# Altium PCB YiWallet-Enc-memory.PcbDoc
Units mm, origin at the board's own origin, x right, y up, seen from the top; angles counter-clockwise.
Board outline 21 x 39.53 mm, 2 copper layers (Top Layer, Bottom Layer); 21 components, 20 nets, 105 pads, 17 vias.
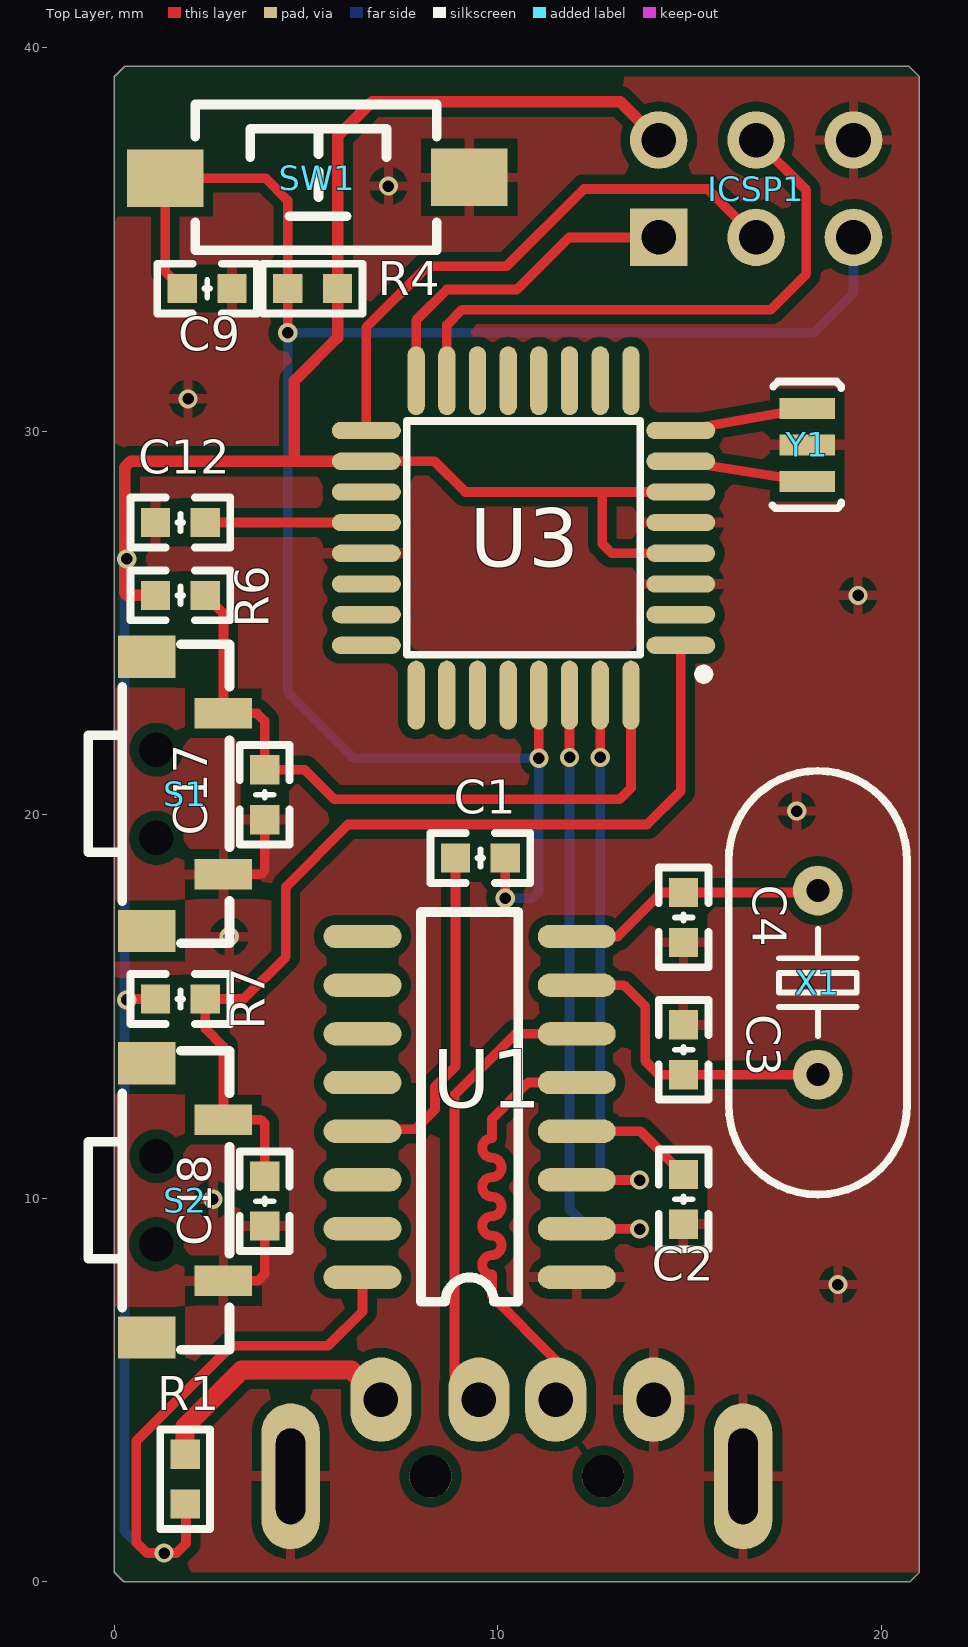
[diagram p0: Top Layer view]
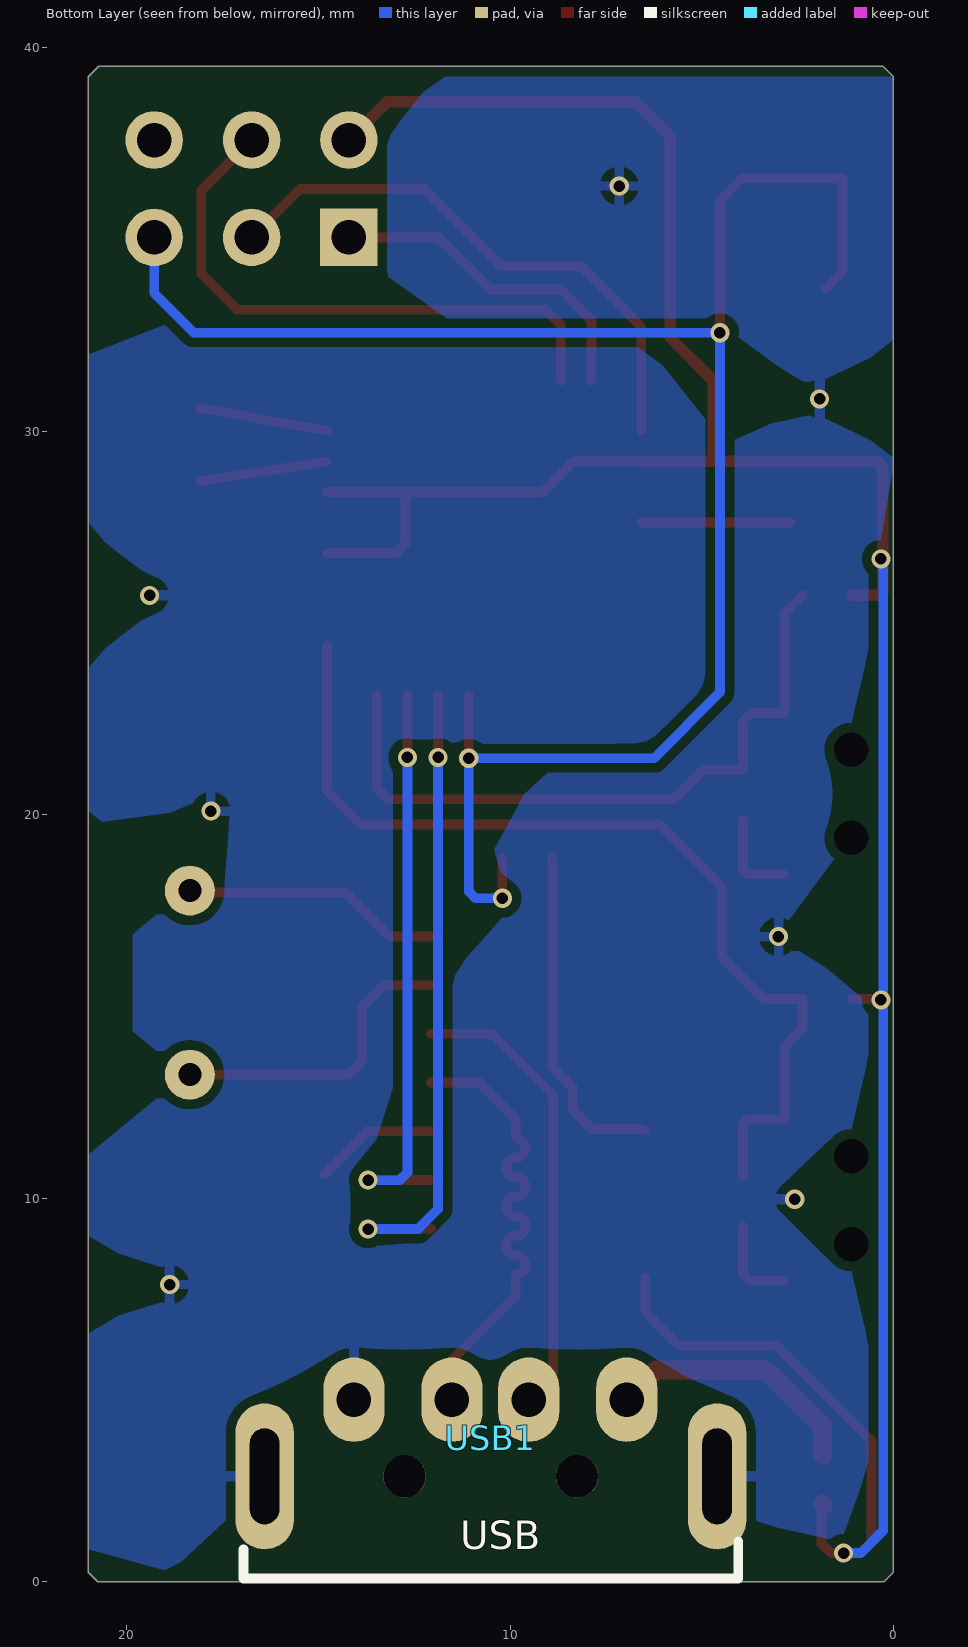
[diagram p1: Bottom Layer view, seen from below]
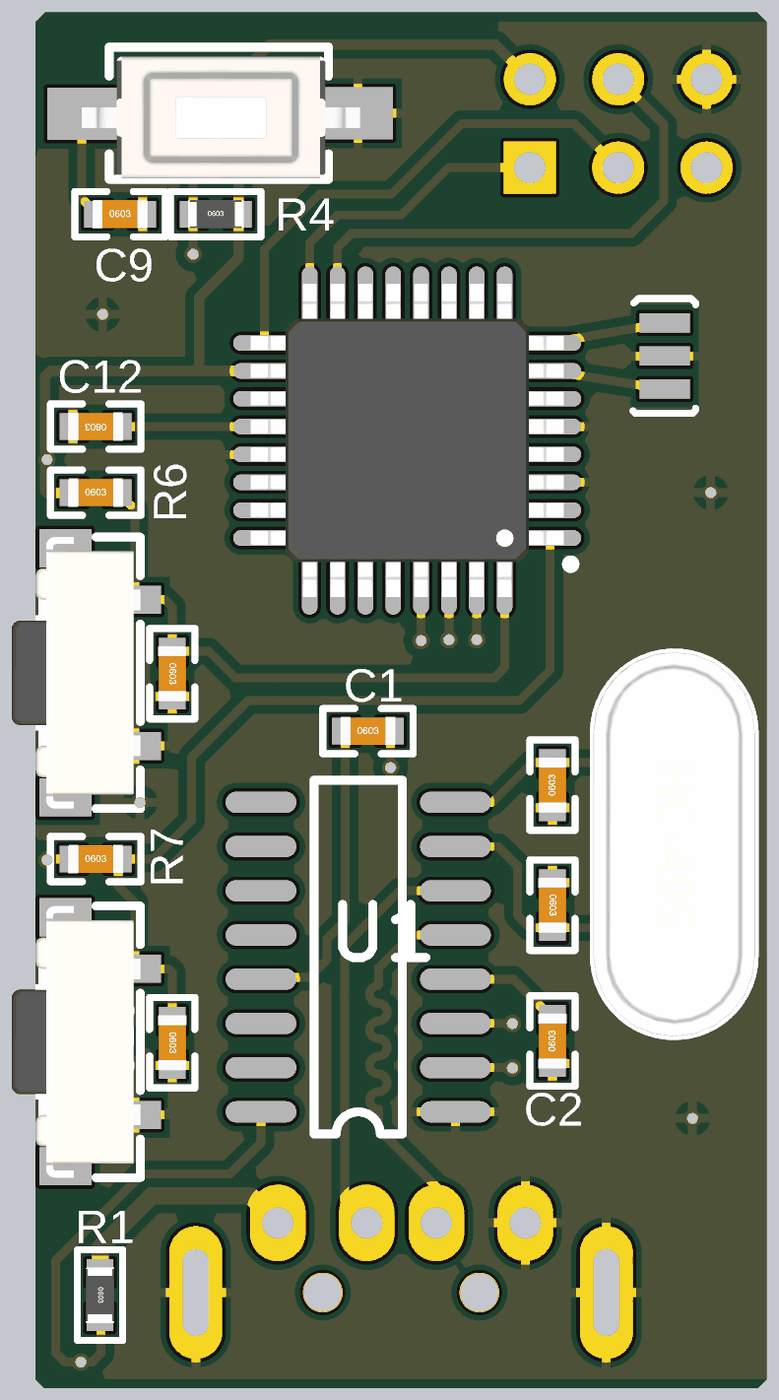
[diagram p2: 3D render of the assembled board from above, using the file's embedded part models]

## Layer stack, top to bottom
Top Solder: solder mask 0.0102, Solder Resist, Dk 3.5
Top Layer: signal copper 0.0356
Dielectric 1: dielectric 0.32, FR-4, Dk 4.8
Bottom Layer: signal copper 0.0356
Bottom Solder: solder mask 0.0102, Solder Resist, Dk 3.5

## Board outline
0.25,0 0,0.25 0,39.25 0.275,39.525 20.725,39.525 21,39.25 21,0.25 20.75,0

## Design rules (kind name [scope] priority, off if disabled: settings)
Clearance [All] p1: gap=0.254 ignorepadtopadclearanceinfootprint=FALSE except(0: Arc-Hole Track-Hole SMDPad-Hole THPad-Hole Via-Hole Fill-Hole Poly-Hole Region-Hole Text-Hole)
PolygonConnect [All] p1: connectstyle=Relief reliefconductorwidth=0.254 reliefentries=4 polygonreliefangle="90 Angle" airgapwidth=0.254
RoutingVias [All] p1: holewidth=0.711 width=1.27 viastyle="Through Hole" minholewidth=0.711 minwidth=1.27 maxholewidth=0.711 maxwidth=1.27
SolderMaskExpansion [All] p1: expansion=0.102
Width [All] p1: maxlimit=10 minlimit=0.254 preferedwidth=0.254 minimp=50.000000 maximp=50.000000 favimp=50.000000
30 further rules are at their usual default settings.

## Components (designator, comment, footprint, x,y, rotation, side; value= is the part's Value field where it differs from the comment)
C1 "104" "C 0603_L" 9.55,18.875 r0 top
C2 "104" "C 0603_L" 14.85,9.975 r90 top
C3 "22pF" "C 0603_L" 14.85,13.875 r270 top
C4 "22pF" "C 0603_L" 14.85,17.325 r90 top
C9 "104" "C 0603_L" 2.425,33.725 r0 top
C12 "0.1uF" "C 0603_L" 1.725,27.625 r180 top
C17 "0.1uF 50V" "C 0603_L" 3.925,20.525 r270 top locked
C18 "0.1uF 50V" "C 0603_L" 3.925,9.925 r270 top locked
ICSP1 "ICSP" HDR2X3 14.2,35.06 r0 top
R1 "BX" "R 0603_L" 1.85,2.675 r270 top
R4 "10K" "R 0603_L" 5.175,33.725 r0 top
R6 "4.7KΩ ±5%" "C 0603_L" 1.725,25.725 r0 top
R7 "4.7KΩ ±5%" "C 0603_L" 1.725,15.2 r0 top
S1 "SWITCH" "TSW 3*6*4.3-S-W" 1.1,20.55 r270 top
S2 "SWITCH" "TSW 3*6*4.3-S-W" 1.1,9.95 r270 top locked
SW1 "3x6x5" "TSW SMD-3*6*2.5" 5.325,36.625 r0 top
U1 "CH340G" SO-16 12.419,12.309 r180 top
U3 "ATmega328P-A" TQFP32-7*7 10.675,27.225 r90 top
USB1 "USB" USB_A/P_A 10.5,2.75 r180 bottom locked
X1 "12MHz" "OSC HC-49S" 18.35,15.625 r270 top
Y1 "16M(村田3x1)" X-CPX20 18.075,29.65 r90 top

## Footprints (in the part's own frame and the unit in brackets; to place one, negate y for a bottom-side part, rotate by r counter-clockwise, add the part's x,y. Pads: shape width x height; smd on the part's side, far side on the other; paste and mask are expansions set on the pad)
"C 0603_L" [mil]
  rect 30x30 smd: 1(-25.59,0) 2(25.59,0)
  silkscreen extent -51,-26 51,26, body extent -31,-16 31,16, height 32
HDR2X3 [mm] "Connector; Header; 3x2 Position"
  rect 1.5x1.5 hole 0.9: 1(0,0)
  round 1.5 hole 0.9: 2(0,2.54) 3(2.54,0) 4(2.54,2.54) 5(5.08,0) 6(5.08,2.54)
"OSC HC-49S" [mm]
  round 1.3 hole 0.6: 1(-2.4,0) 2(2.4,0)
  silkscreen extent -5.52,-2.32 5.52,2.33, body extent -5.52,-2.32 5.53,2.33, height 4.13
"R 0603_L" [mil] "1/10W贴片电阻"
  rect 30x30 smd: 1(-25.59,0) 2(25.59,0)
  silkscreen extent -51,-26 51,26, body extent -31,-16 32,16, height 16
SO-16 [mil]
  oval 80x24 smd: 1(14,172) 2(14,122) 3(14,72) 4(14,22) 5(14,-28) 6(14,-78) 7(14,-128) 8(14,-178) 9(234,-178) 10(234,-128) 11(234,-78) 12(234,-28) 13(234,22) 14(234,72) 15(234,122) 16(234,172)
  silkscreen extent 74,-203 174,197
TQFP32-7*7 [mm] "7x7mm, 0.8mm(蒜米工坊）"
  oval 0.45x1.8 smd: 1(-2.803,-4.1) 2(-2.003,-4.1) 3(-1.203,-4.1) 4(-0.403,-4.1) 5(0.397,-4.1) 6(1.197,-4.1) 7(1.997,-4.1) 8(2.797,-4.1) 17(2.797,4.1) 18(1.997,4.1) 19(1.197,4.1) 20(0.397,4.1) 21(-0.403,4.1) 22(-1.203,4.1) 23(-2.003,4.1) 24(-2.803,4.1)
  oval 1.8x0.45 smd: 9(4.097,-2.8) 10(4.097,-2) 11(4.097,-1.2) 12(4.097,-0.4) 13(4.097,0.4) 14(4.097,1.2) 15(4.097,2) 16(4.097,2.8) 25(-4.103,2.8) 26(-4.103,2) 27(-4.103,1.2) 28(-4.103,0.4) 29(-4.103,-0.4) 30(-4.103,-1.2) 31(-4.103,-2) 32(-4.103,-2.8)
  silkscreen extent -3.68,-4.82 3.05,3.05, body extent -4.5,-4.5 4.5,4.5, height 1.05
"TSW 3*6*4.3-S-W" [mm] "侧立贴片3*6*4.3"
  rect 1.1x1.5 smd: 0(-3.575,-0.25) 0(3.575,-0.25)
  round 0 hole 0.9: 0(-1.15,0) 0(1.15,0)
  rect 0.8x1.5 smd: 1(2.1,1.75) 2(-2.1,1.75)
  silkscreen extent -3.9,-1.78 3.9,1.91, body extent -3.9,-1.79 3.9,1.91, height 3.51
"TSW SMD-3*6*2.5" [mm]
  rect 2x1.5 smd: 1(-3.996,-0.02) 2(3.937,0)
  silkscreen extent -3.21,-1.9 3.09,1.9, body extent -4,-1.88 4,1.62, height 2.59
USB_A/P_A [mm] "A型USB 插头，20*13*4.5mm"
  round 1.1 hole 1.1: 0(-2.25,0) 0(2.25,0)
  oval 1.6x2.2 hole 0.9: 1(3.543,2) 2(0.987,2) 3(-1.013,2) 4(-3.569,2)
  oval 1.524x3.81 hole 0.762 slot 2.5 at 90 deg: 4(-5.9,0) 4(5.9,0)
  silkscreen extent -6.45,-2.67 6.45,-1.7, body extent -6.47,-17.9 6.47,2.11, height 3.25
X-CPX20 [mm]
  rect 0.55x1.45 smd: 1(-0.95,0) 2(0,0) 3(0.95,0)
  silkscreen extent -1.65,-0.89 1.65,0.91

## Part data
C1 C2 C3 C4 C9: library part C, "无极性贴片电容", BOM名称=无极性贴片电容, 学习资源=www.ooocke.com, 版权归属=源创客
C12: library part "Cap Pol3", "Polarized Capacitor (Surface Mount)", Published=8-Jun-2000, Publisher="Altium Limited", Revision="July-2002: Re-released for DXP Platform."
C17 C18: library part "C-0.1uF 50V 0603", "贴片电容 0.1uF 50V ±10% -55~+125℃ 0603 X7R CL10B104KB8NNNC", LH=C01-100N26-100, U_TABLE=U_C
ICSP1: library part "Header 3X2", "Header, 3-Pin, Dual row", LatestRevisionDate=17-Jul-2002, LatestRevisionNote="Re-released for DXP Platform.", Publisher="Altium Limited"
R1 R4: library part R, "贴片电阻", BOM名称=贴片电阻, 学习资源=www.ooocke.com, 版权归属=源创客
R6 R7: library part "R-4K7 0603 5%", "贴片电阻 4.7KΩ 1/10W ±5% ±200ppm 0603", LH=R01-4K7026-100, U_TABLE=U_R
S1 S2: library part SW_PB6.2*6.2_5, "开关（轻触）", LH=Y07-031-0000, U_1002（指定生产商）=浙江开拓数码科技有限公司, U_200002（型号）=TS-1070, U_200084（尺寸(mm)）=6.2*6.2, U_200140（总高(mm)）=5.00000000000000, U_200141（柄长(mm)）=0.000000000000000, U_CL2_ITEMM_00（物料编码）=20110000000004, U_CL2_ITEMR_00（物料描述）="插件轻触开关 TS-1070 6.2*6.2*5mm 高", U_ITEM_ID（item_id）=Part00058227, U_OBJECT_NAME（物料名称）=CL710N99-6循显插件轻触开关, U_TABLE=U_SW
SW1: library part "TSW 3x6", "3x6轻触开关", BOM名称=3x6轻触开关, 学习资源=www.ooocke.com, 版权归属=源创客
U3: library part ATmega8-16AC, "8-Bit AVR Microcontroller with 8K Bytes of In-System Programmable Flash Memory"
USB1: library part USB-A/P, "USB-A型公接口", BOM名称=USB-A型公接口, 学习资源=www.ooocke.com, 版权归属=源创客
X1: library part XTAL-2P, "2脚无源脚晶振", BOM名称=2脚无源脚晶振, 学习资源=www.ooocke.com, 版权归属=源创客
Y1: library part ECS-35-17-4-3IL, "Crystal Oscillator, 3rd In-Line Lead Version", Package Reference=HC-49US, Datasheet="Latest Revision: 18-Apr-2000", Published=17-Jul-2002, Publisher="Altium Limited"

## Via types
v1: diameter 0.5, hole 0.3, Top Layer to Bottom Layer, tented both sides, 17 vias

## Nets (pads, with @x,y where several pads share a name; then routed paths per layer and width w, separated by ;. In a path a pad name is that pad's centre, name@x,y a point inside that pad or via, vN(x,y) a via of type N, cw(c..) or ccw(c..) an arc to the next point about the centre after c; other vN are vias at no path point)
5V: R1.1 USB1.1 | length 6.8
  Top Layer w0.5: R1.1 1.85,4.05 3.325,5.525 6.182,5.525 USB1.1
D+: U1.5 USB1.3 | length 12.6
  Top Layer w0.254: USB1.3 11.513,5.787 9.85,7.45 9.85,7.6 9.85,8.011 cw(c9.85,8.265) 9.85,8.519 ccw(c9.85,8.773) 9.85,9.027 cw(c9.85,9.281) 9.85,9.535 ccw(c9.85,9.789) 9.85,10.043 cw(c9.85,10.297) 9.85,10.551 ccw(c9.85,10.805) 9.85,11.059 cw(c9.85,11.313) 9.85,11.567 9.85,12.075 10.795,13.02 U1.5
D-: U1.6 USB1.2 | length 12.1
  Top Layer w0.254: USB1.2 8.875,5.388 8.875,12.7 10.465,14.29 U1.6
GND: C2.1 C3.1 C4.1 C9.2 C12.2 C17.2 C18.2 ICSP1.6 S1.1 S2.1 SW1.2 U1.1 U3.3 U3.5 U3.21 USB1.4 Y1.2 | length 4.8
  Top Layer w0.254: S2.1 3.75,7.85 3.925,8.025 C18.2 ; S1.1 3.825,18.45 3.925,18.55 C17.2
  other v1: 18.875,7.75 2.575,9.975 3,16.825 17.8,20.1 19.4,25.725 1.925,30.85 7.15,36.4
KEY1: C17.1 R6.2 S1.2 U3.32 | length 18.1
  Top Layer w0.254: R6.2 2.85,25.25 S1.2 3.725,22.65 3.925,22.45 C17.1 4.973,21.175 5.741,20.407 13.182,20.407 13.475,20.7 U3.32
KEY2: C18.1 R7.2 S2.2 U3.1 | length 25.4
  Top Layer w0.254: C18.1 3.925,11.95 3.825,12.05 S2.2 2.85,13.95 2.375,14.425 R7.2 3.375,15.2 4.475,16.3 4.475,18.125 6.1,19.75 13.9,19.75 14.775,20.625 U3.1
MISO: ICSP1.1 U3.16 | length 8.8
  Top Layer w0.254: U3.16 7.875,32.9 8.675,33.7 10.5,33.7 11.86,35.06 ICSP1.1
MOSI: ICSP1.4 U3.15 | length 15.4
  Top Layer w0.254: U3.15 8.675,32.775 9.075,33.175 17.125,33.175 18.05,34.1 18.05,36.29 ICSP1.4
NetC1_1: C1.1 U1.13 | length 8.9
  Top Layer w0.254: U1.13 6.525,11.8 7.85,11.8 8.367,12.317 8.367,12.91 8.9,13.443 C1.1
NetC2_2: C2.2 U1.4 | length 3.3
  Top Layer w0.254: U1.4 13.725,11.75 C2.2
NetC12_1: C12.1 U3.20 | length 3.9
  Top Layer w0.254: C12.1@2.697,27.622 U3.20
NetU3_7: U3.7 Y1.1 | length 3.3
  Top Layer w0.254: U3.7 Y1.1
NetU3_8: U3.8 Y1.3 | length 3.4
  Top Layer w0.254: U3.8 Y1.3
RESET: C1.2 C9.1 ICSP1.5 R4.1 SW1.1 U3.29 | length 50.3
  Top Layer w0.254: C9.1 1.329,34.171 SW1.1 3.945,36.605 4.525,36.025 v1(4.525,32.575) ; v1(10.2,17.825) C1.2 ; v1(11.075,21.475) U3.29
  Bottom Layer w0.254: v1(10.2,17.825) 10.9,17.825 11.075,18 v1(11.075,21.475) 6.25,21.475 4.525,23.2 v1(4.525,32.575) 18.25,32.575 19.28,33.605 ICSP1.5
RXD: U1.3 U3.31 | length 15.2
  Top Layer w0.254: U1.3 13.695,10.48 v1(13.7,10.475) ; v1(12.675,21.5) U3.31
  Bottom Layer w0.254: v1(12.675,21.5) 12.675,10.675 12.875,10.475 v1(13.7,10.475)
SCK: ICSP1.3 U3.17 | length 14.9
  Top Layer w0.254: U3.17 6.575,32.718 8.165,34.308 10.233,34.308 12.25,36.325 15.475,36.325 ICSP1.3
TXD: U1.2 U3.30 | length 17.1
  Top Layer w0.254: v1(11.875,21.5) U3.30 ; U1.2 13.69,9.21 v1(13.7,9.2)
  Bottom Layer w0.254: v1(11.875,21.5) 11.875,9.725 12.4,9.2 v1(13.7,9.2)
VCC: ICSP1.2 R1.2 R4.2 R6.1 R7.1 U1.16 U3.4 U3.6 U3.18 | length 81.5
  Top Layer w0.254: v1(0.325,15.175) 0.35,15.2 R7.1 ; R1.2 1.875,2 1.875,1 1.625,0.75 v1(1.3,0.75) 0.85,0.75 0.575,1.025 0.575,3.675 3.056,6.156 5.581,6.156 6.475,7.05 U1.16 ; U3.18 8.357,29.222 9.157,28.422 12.725,28.422 ; U3.4 12.978,26.822 12.725,27.075 12.725,28.422 ; U3.6 12.725,28.422
  Top Layer w0.3: R6.1 0.325,25.725 0.275,25.775 0.275,29.07 0.428,29.222 4.7,29.222 ; U3.18 4.7,29.222 ; ICSP1.2 13.2,38.6 6.725,38.6 5.825,37.7 R4.2 5.825,32.45 4.7,31.325 4.7,29.222
  Top Layer w0.5: R1.2@1.825,2 R1.2
  Bottom Layer w0.254: v1(0.325,26.675) 0.269,26.619 0.269,15.231 v1(0.325,15.175) 0.269,15.119 0.269,1.331 0.85,0.75 v1(1.3,0.75)
XI: C3.2 U1.7 X1.2 | length 8.1
  Top Layer w0.254: U1.7 13.29,15.56 13.85,15 13.85,13.575 14.2,13.225 C3.2 X1.2
XO: C4.2 U1.8 X1.1 | length 6.8
  Top Layer w0.254: U1.8 13.13,16.83 14.275,17.975 C4.2 18.3,17.975 X1.1
pads on no net: S1.0 S2.0 U1.9 U1.10 U1.11 U1.12 U1.14 U1.15 U3.2 U3.9 U3.10 U3.11 U3.12 U3.13 U3.14 U3.19 U3.22 U3.23 U3.24 U3.25 U3.26 U3.27 U3.28 USB1.0

## Polygon pours and split planes (outlines as drawn)
GND on Top Layer "GND_L01_P000" (solid, remove dead copper, pour order 0): 0,39.25 21,39.25 21,0.25 0,0.25
GND on Bottom Layer "GND_L02_P004" (solid, remove dead copper, pour order 4): 0,39.25 21,39.25 21,0.25 0,0.25

## Silkscreen, mask and mechanical layers (free items; w line width, h text height)
Mechanical 1:
  lines w0.1: 0,0.25 0,39.25 0.275,39.525 2.225,39.525 20.725,39.525 21,39.25 21,0.25 20.75,0 0.25,0 0,0.25